# Altium PCB WienOsilator.PcbDoc
Units mm, origin at the board's own origin, x right, y up, seen from the top; angles counter-clockwise.
Board outline 50 x 50 mm, 2 copper layers (Top Layer, Bottom Layer); 19 components, 12 nets, 46 pads, 0 vias.
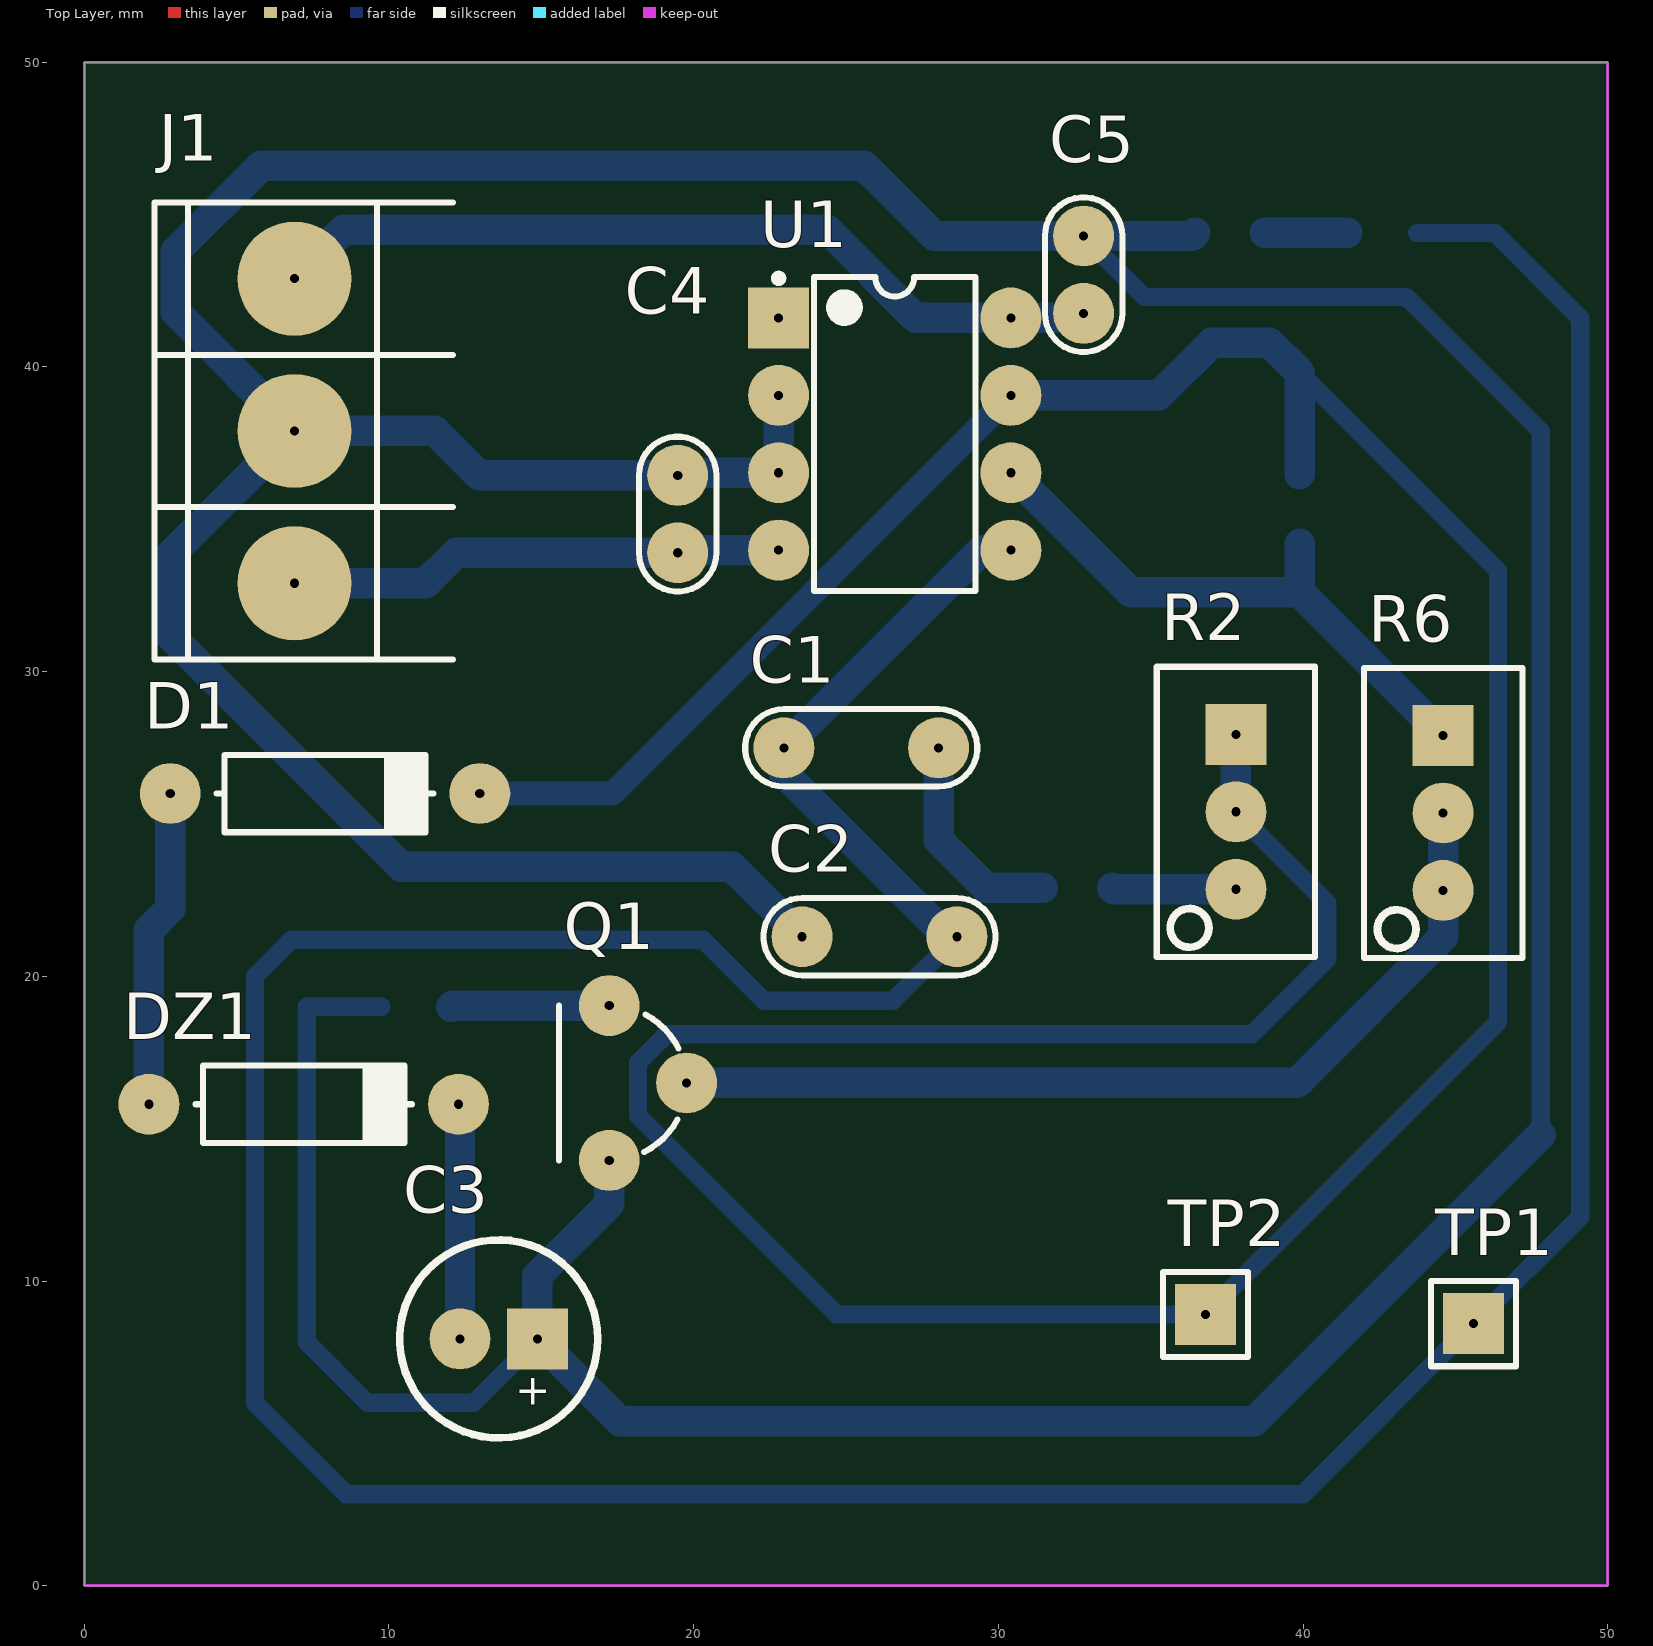
[diagram p0: Top Layer view]
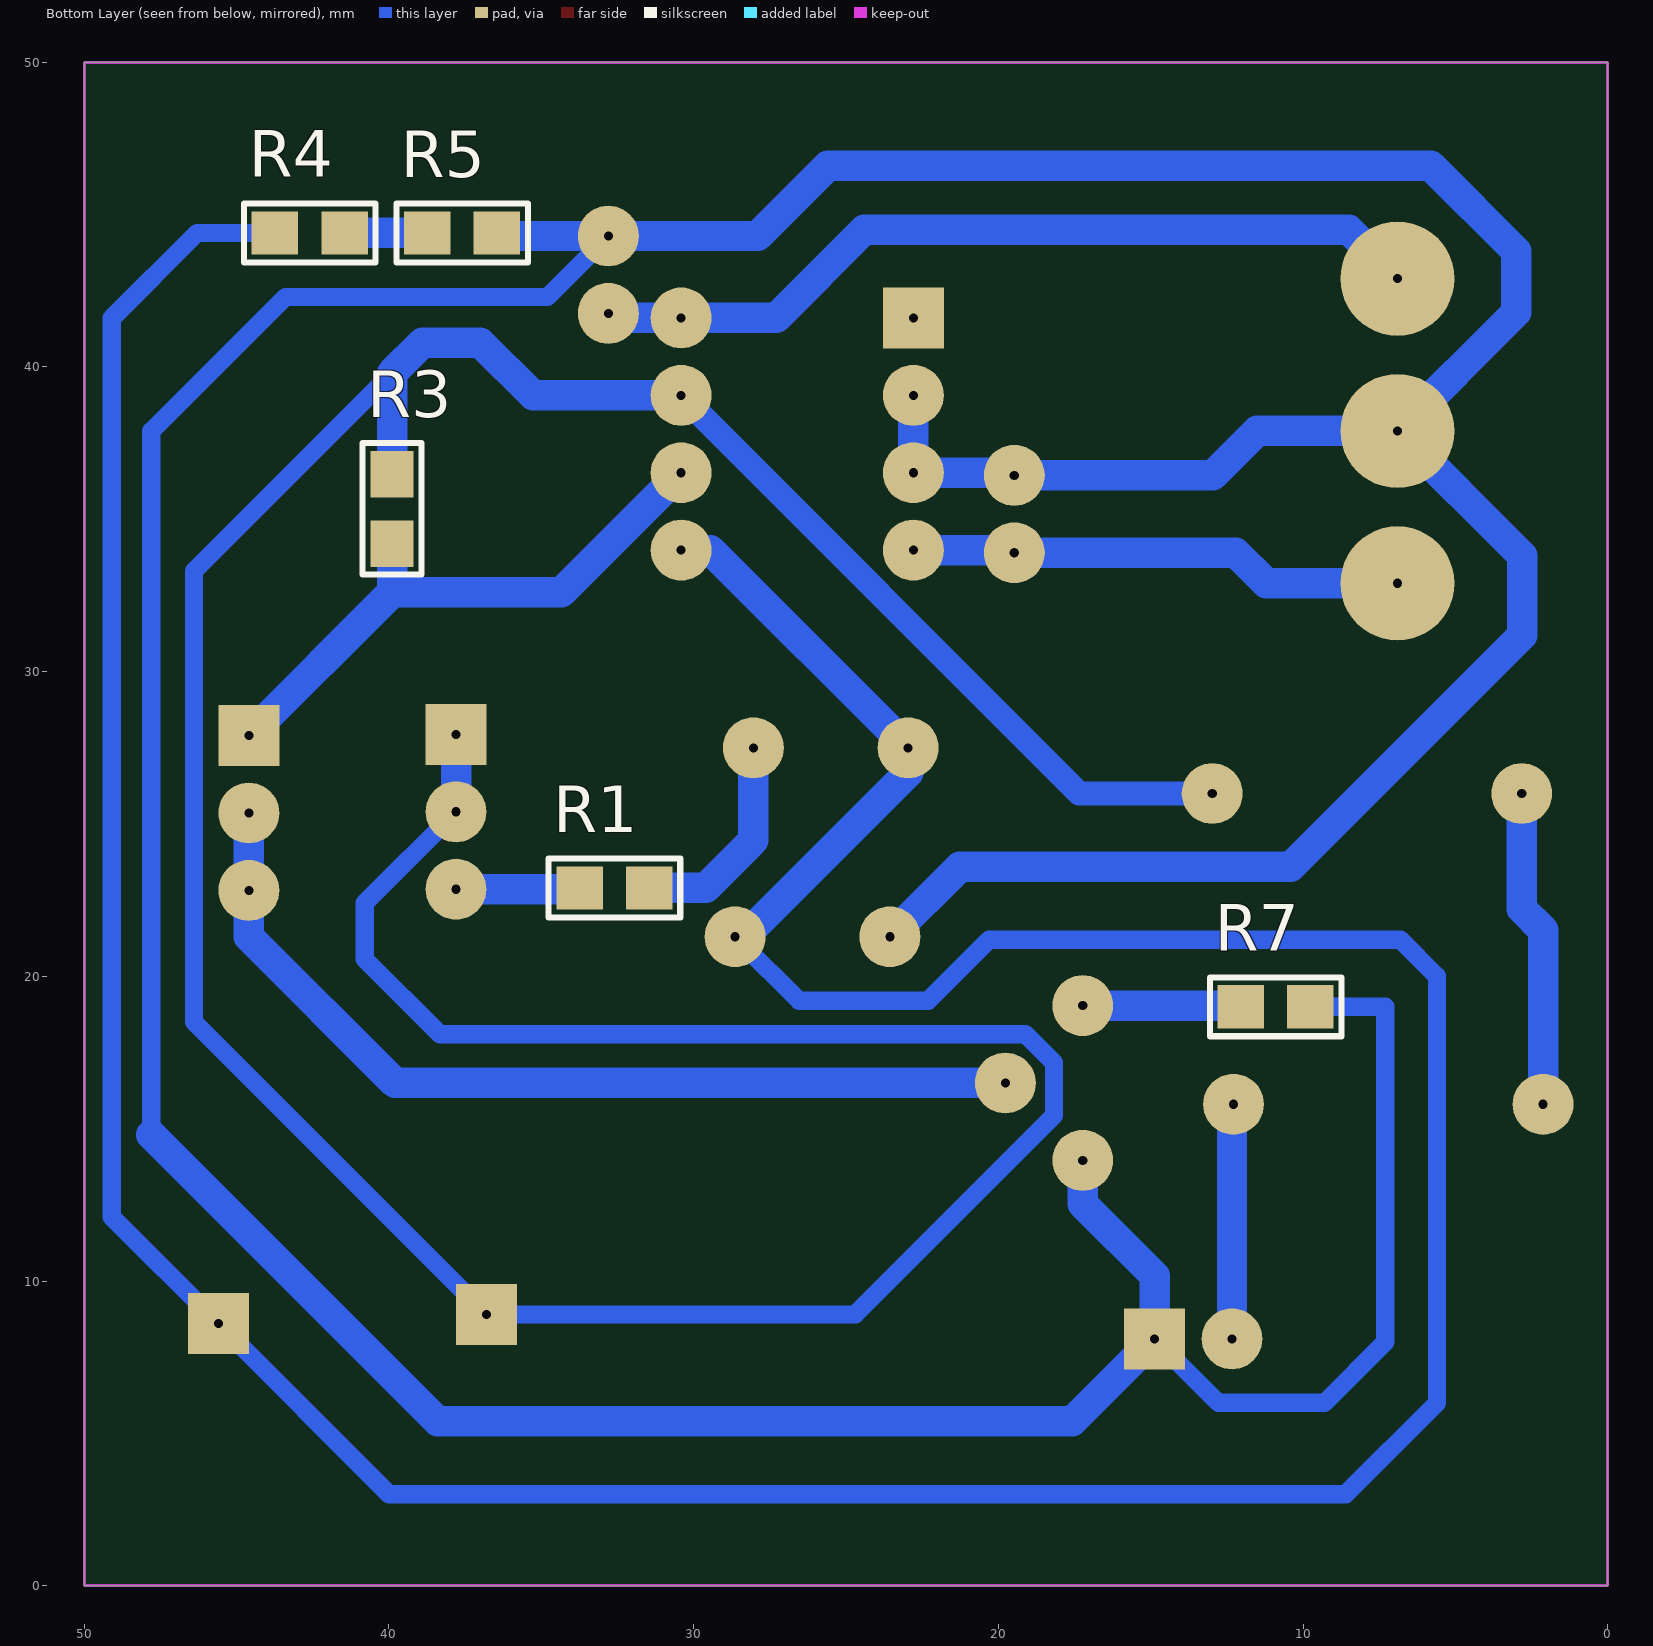
[diagram p1: Bottom Layer view, seen from below]
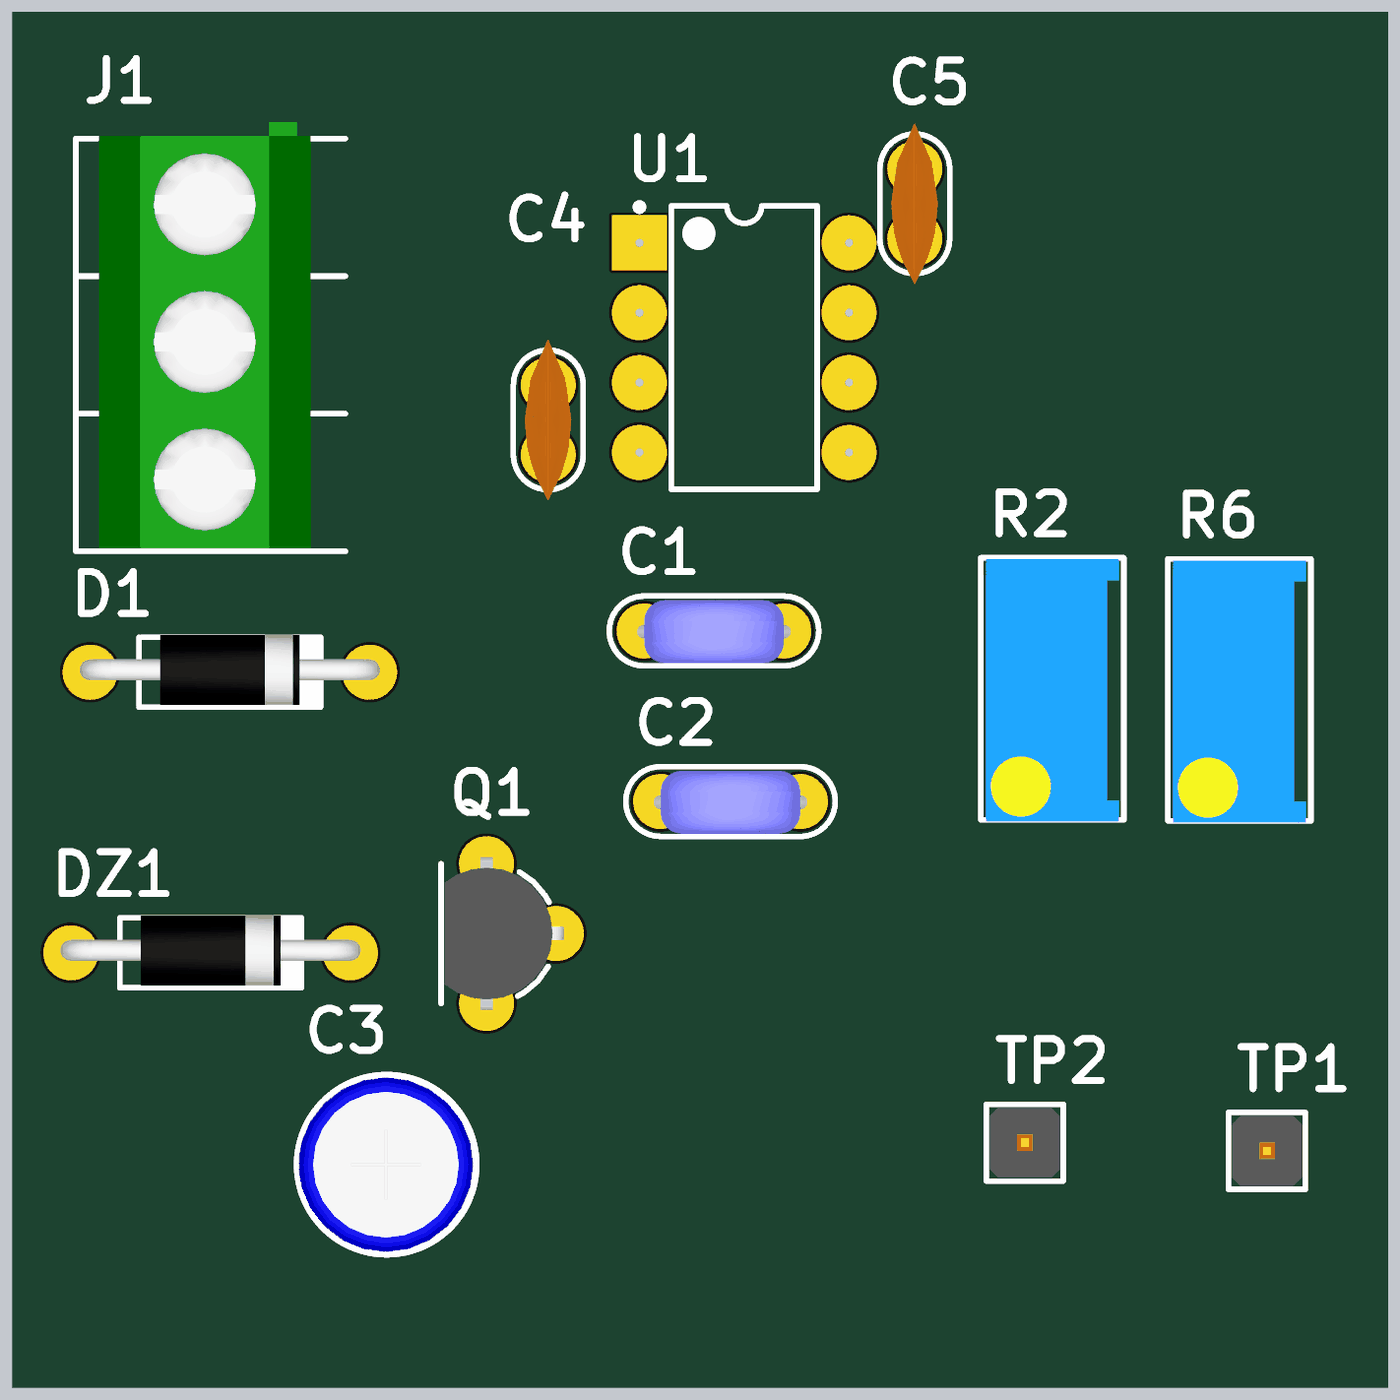
[diagram p2: 3D render of the assembled board from above, using the file's embedded part models]
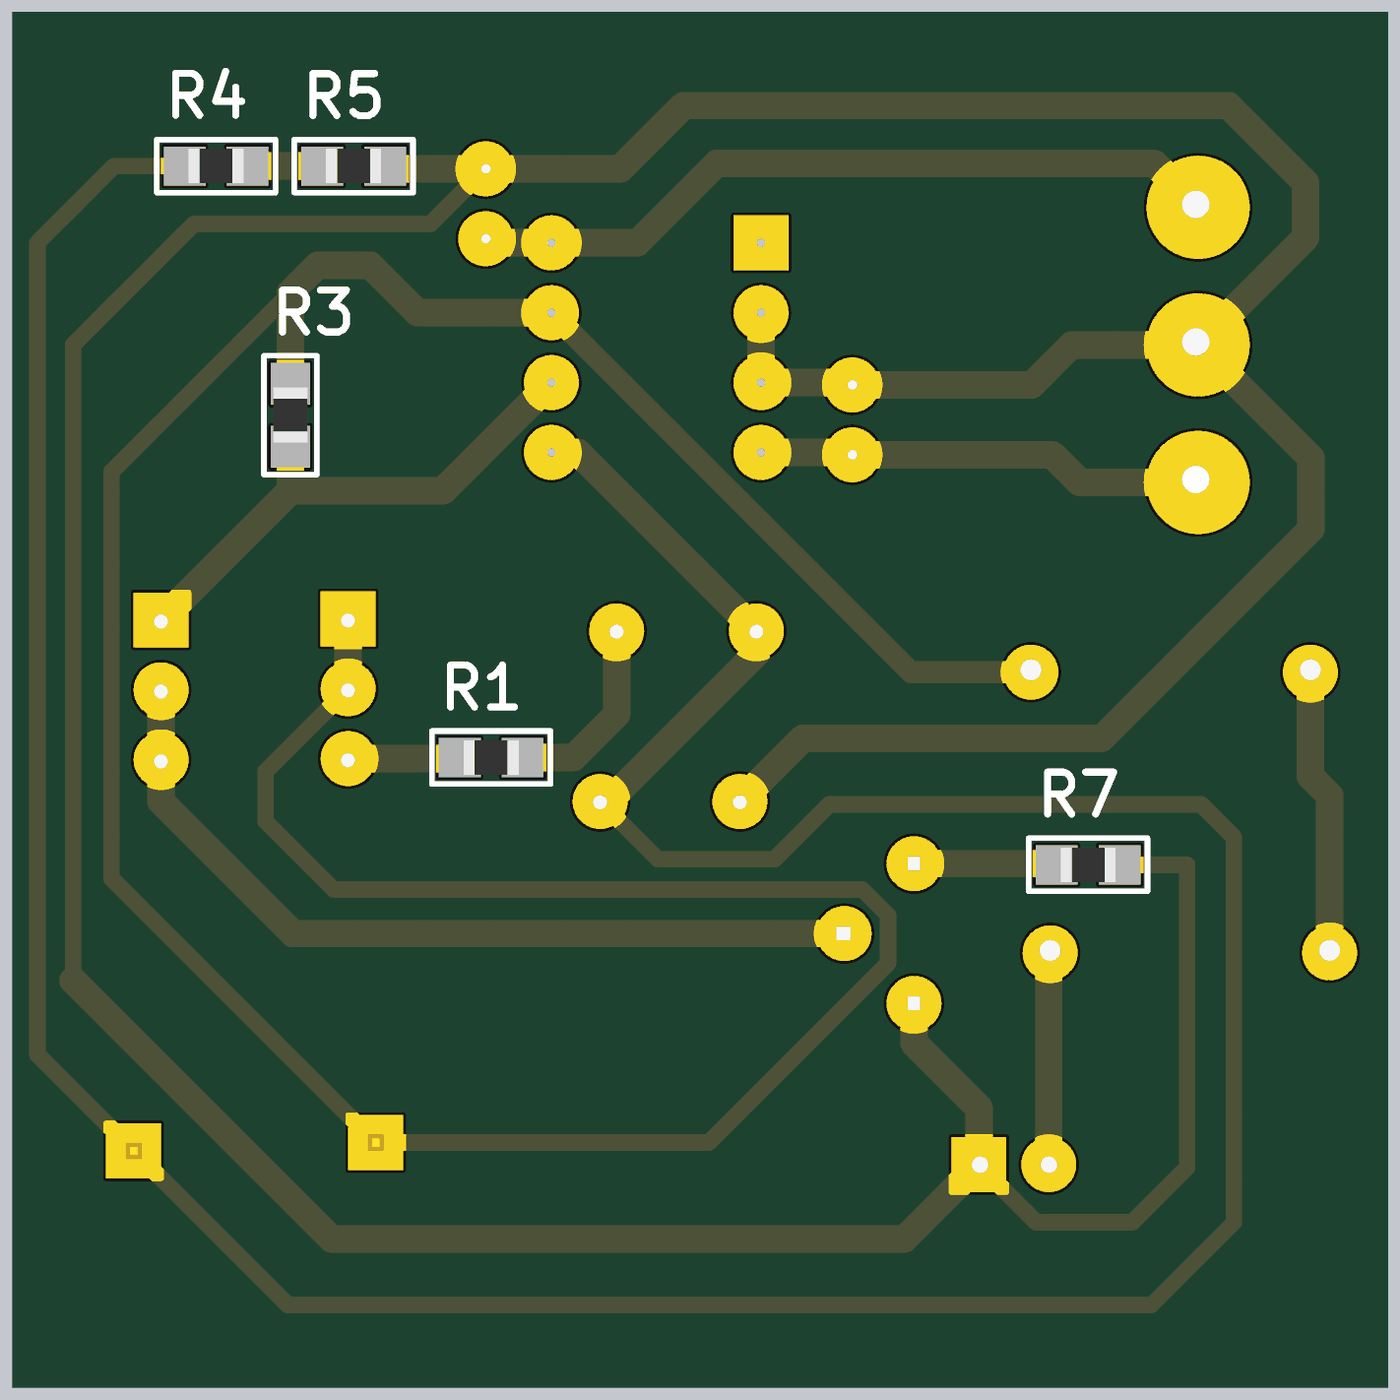
[diagram p3: 3D render of the assembled board from below, using the file's embedded part models]

## Layer stack, top to bottom
Top Solder: solder mask 0.0102, Solder Resist, Dk 3.5
Top Layer: signal copper 0.0356
Dielectric 1: dielectric 0.32, FR-4, Dk 4.8
Bottom Layer: signal copper 0.0356
Bottom Solder: solder mask 0.0102, Solder Resist, Dk 3.5

## Board outline
0,0 50,0 50,50 0,50

## Design rules (kind name [scope] priority, off if disabled: settings)
Clearance [All] p1: gap=0.3 ignorepadtopadclearanceinfootprint=FALSE
PolygonConnect [All] p1: connectstyle=Relief reliefconductorwidth=0.254 reliefentries=4 polygonreliefangle="90 Angle" airgapwidth=0.254
RoutingVias [All] p1: holewidth=0.711 width=1.27 viastyle="Through Hole" minholewidth=0.711 minwidth=1.27 maxholewidth=0.711 maxwidth=1.27
SolderMaskExpansion [All] p1: expansion=0.102
Width [All] p1: maxlimit=1 minlimit=0.6 preferedwidth=0.8
30 further rules are at their usual default settings.

## Components (designator, comment, footprint, x,y, rotation, side; value= is the part's Value field where it differs from the comment)
C1 "1n" CAP200 25.5,27.5 r0 top
C2 "1n" CAP200 26.1,21.3 r0 top
C3 "1u" CAP100RP2 13.6,8.1 r180 top
C4 "100n" CAP100 19.476,35.174 r90 top
C5 "100n" CAP100 32.8,43.03 r90 top
D1 "1N4148" DO41 7.9,26 r0 top
DZ1 "DIODO ZENER" DO41 7.2,15.8 r0 top
J1 "SOURCE" BORNERA3 6.9,37.9 r0 top
Q1 "MPF102" TO92 18.5,16.5 r90 top
R1 "1K5" 0805 32.6,22.9 r180 bottom
R2 "1K PRES" "PRESET V" 37.8,25.4 r270 top
R3 "100K" 0805 39.9,35.343 r270 bottom
R4 "1K" 0805 42.6,44.4 r180 bottom
R5 "1K" 0805 37.6,44.4 r180 bottom
R6 "100K PRES" "PRESET V" 44.6,25.36 r270 top
R7 "1M" 0805 10.9,19 r0 bottom
TP1 "TP" TPTH 45.6,8.6 r0 top
TP2 "TP" TPTH 36.8,8.9 r0 top
U1 "TL082CP" N08E 26.6,37.8 r0 top

## Footprints (in the part's own frame and the unit in brackets; to place one, negate y for a bottom-side part, rotate by r counter-clockwise, add the part's x,y. Pads: shape width x height; smd on the part's side, far side on the other; paste and mask are expansions set on the pad)
0805 [mil] "Pasivo 0805"
  rect 60x56 smd: 1(-45,0) 2(45,0)
  silkscreen extent -85,-38 85,38, body extent -40,-25 39,25, height 15
BORNERA3 [mm] "Bornera con Tornillos 5mm separación"
  round 3.75 hole 0.3: 1(0,5) 2(0,0) 3(0,-5)
  silkscreen extent -4.6,-7.5 5.2,7.5, body extent -3.76,-7.39 3.94,8.11, height 10.05
CAP100 [mm]
  round 2 hole 0.3: 1(-1.27,0) 2(1.27,0)
  silkscreen extent -2.54,-1.27 2.54,1.27, body extent -2.92,-0.84 2.92,0.86, height 6.12
CAP100RP2 [mm] "Body diameter 6.5mm"
  rect 2x2 hole 0.3: 1(-1.27,0)
  round 2 hole 0.3: 2(1.27,0)
  silkscreen extent -3.25,-3.25 3.25,3.25, body extent -3.15,-3.18 3.2,3.18, height 11.53
CAP200 [mm]
  round 2 hole 0.3: 1(-2.54,0) 2(2.54,0)
  silkscreen extent -3.81,-1.27 3.81,1.27, body extent -2.79,-1.17 2.79,1.12, height 6.24
DO41 [mm]
  round 2 hole 0.3: 1(-5.08,0) 2(5.08,0)
  silkscreen extent -3.56,-1.27 3.56,1.27, body extent -5.46,-1.19 5.46,1.37, height 2.03
N08E [mm] "DIP, 8-Leads, Row Spacing 7.62mm, Pitch 2.54mm, Body 9.91x6.35mm"
  rect 2x2 hole 0.3: 1(-3.81,3.81)
  round 2 hole 0.3: 2(-3.81,1.27) 3(-3.81,-1.27) 4(-3.81,-3.81) 5(3.81,-3.81) 6(3.81,-1.27) 7(3.81,1.27) 8(3.81,3.81)
  silkscreen extent -3.93,-5.15 2.65,5.23, body extent -3.6,-5.15 3.6,5.15, height 5.34
"PRESET V" [mm]
  rect 2x2 hole 0.3: 1(-2.54,0)
  round 2 hole 0.3: 2(0,0) 3(2.54,0)
  silkscreen extent -4.76,-2.6 4.76,2.6, body extent -4.7,-2.42 4.83,2.42, height 11.55
TO92 [mm]
  round 2 hole 0.3: 1(0,-1.27) 2(2.54,1.27) 3(-2.54,1.27)
  silkscreen extent -2.54,-1 2.54,2.92, body extent -2.79,-1.55 2.79,2.79, height 8
TPTH [mm]
  rect 2x2 hole 0.3: 1(0,0)
  silkscreen extent -1.4,-1.4 1.4,1.4, body extent -1.27,-1.27 1.27,1.27, height 6.04

## Part data
C1 C2 C4 C5: library part CAP
C3: library part CAPPOL
D1: library part DIODO
J1: library part "BORNERA 3"
Q1: library part JFET-N, "N-Channel JFET", Code_JEDEC=TO-254-AA, LatestRevisionDate=17-Jul-2002, LatestRevisionNote="Re-released for DXP Platform.", PackageReference=TO-254-AA, Published=8-Jun-2000, Publisher="Altium Limited"
R1 R3 R4 R5 R7: library part RES
R2 R6: library part PRESET
U1: "Wide Bandwidth Dual JFET Input Operational Amplifier, 8-pin MDIP", Manufacturer="National Semiconductor", PackageTopMarking=NSUZXYTTE#*TL082*CP, PowerWise=N, Code_JEDEC=MS-001-BA, ComponentLink1Description="TL082 Datasheet", ComponentLink1URL=http://www.national.com/ds/TL/TL082.pdf, ComponentLink2Description="TL082 Web Page", ComponentLink2URL=http://www.national.com/pf/TL/TL082.html, ComponentLink3Description="N08E Package Page", ComponentLink3URL=http://www.national.com/packaging/folders/n08e.html, CompType=Amplifiers, DatasheetVersion=Aug-2000, LatestRevisionDate=13-Jan-2009, LatestRevisionNote="Sim Model Added.", PackageDescription="MDIP, .365 x .250 x .130in, 8 Lead, .100in Pitch", PackageReference=N08E, PackageVersion="revG, May-2006", PartNumber=TL082CP, PinCount=8, Published=4-Dec-2008, Publisher="Altium Limited", RoHS=N

## Nets (pads, with @x,y where several pads share a name; then routed paths per layer and width w, separated by ;. In a path a pad name is that pad's centre, name@x,y a point inside that pad or via, vN(x,y) a via of type N, cw(c..) or ccw(c..) an arc to the next point about the centre after c; other vN are vias at no path point)
+18: C4.1 J1.3 U1.4 | length 16.3
  Bottom Layer w1: J1.3 11.2,32.9 12.204,33.904 C4.1 19.562,33.99 U1.4
-18: C5.1 J1.1 U1.8 | length 27.8
  Bottom Layer w1: J1.1 8.5,44.5 24.4,44.5 27.29,41.61 U1.8 32.65,41.61 C5.1
GND: C2.1 C3.1 C4.2 C5.2 J1.2 Q1.3 R5.2 R7.1 U1.2 U1.3 | length 203.7
  Bottom Layer w0.6: R7.1 7.3,19 7.3,8 9.3,6 12.77,6 C3.1 ; C5.2 34.8,42.3 43.4,42.3 47.8,37.9 47.8,14.8
  Bottom Layer w1: Q1.3 17.23,12.53 14.87,10.17 C3.1 17.57,5.4 38.4,5.4 47.8,14.8 ; U1.2 U1.3 19.562,36.53 C4.2 12.956,36.444 11.5,37.9 J1.2 ; C2.1 21.26,23.6 10.4,23.6 2.8,31.2 2.8,33.8 J1.2 ; R5.2 36.357,44.3 C5.2 27.9,44.3 25.6,46.6 5.8,46.6 3,43.8 3,41.8 J1.2
IN: C1.1 C2.2 R4.1 TP1.1 U1.5 | length 142.5
  Bottom Layer w0.6: C2.2 28.49,21.15 26.54,19.2 22.3,19.2 20.3,21.2 6.8,21.2 5.6,20 5.6,6 8.6,3 40,3 TP1.1 49.1,12.1 49.1,41.6 46.3,44.4 R4.1
  Bottom Layer w1: C2.2@28.49,21.15 22.96,26.68 C1.1 29.45,33.99 U1.5
NetC1_2: C1.2 R1.2 | length 7.1
  Bottom Layer w1: C1.2 28.04,24.46 29.6,22.9 R1.2
NetC3_2: C3.2 DZ1.2 Q1.2 R7.2 | length 12.9
  Bottom Layer w1: R7.2 12.083,19.04 Q1.2 ; DZ1.2 12.33,15.75 C3.2
NetD1_1: D1.1 DZ1.1 | length 10.5
  Bottom Layer w1: DZ1.1 2.12,21.52 2.82,22.22 D1.1
NetQ1_1: Q1.1 R6.2 R6.3 | length 30.9
  Bottom Layer w1: Q1.1 39.8,16.5 44.6,21.3 R6.3 R6.2
NetR1_1: R1.1 R2.3 | length 4.1
  Bottom Layer w1: R1.1 33.783,22.86 R2.3
NetR3_2: R3.2 R6.1 U1.6 | length 19.4
  Bottom Layer w1: U1.6 30.416,36.53 34.346,32.6 39.9,32.6 ; R3.2 39.9,32.6 ; R6.1 39.9,32.6
NetR4_2: R4.2 R5.1 | length 2.7
  Bottom Layer w1: R5.1 R4.2
OUT: D1.2 R2.1 R2.2 R3.1 TP2.1 U1.7 | length 130.1
  Bottom Layer w0.6: R2.2 40.8,22.4 40.8,20.576 38.324,18.1 19.107,18.1 18.17,17.163 18.17,15.43 24.7,8.9 TP2.1 46.4,18.5 46.4,33.3 39.9,39.8
  Bottom Layer w0.8: D1.2 17.34,26 U1.7
  Bottom Layer w1: U1.7 35.27,39.07 37,40.8 38.9,40.8 39.9,39.8 R3.1 ; R2.2 R2.1
pads on no net: U1.1

## Keep-outs
Keep-Out Layer:
  the board outline again, w0.1

## Text inside footprints (layer, text, board x,y; h text height)
C3: Top Overlay "+" at 15.302,6.805 h1.02 r180